# Altium PCB Driver3.PcbDoc
Units mm, origin at the board's own origin, x right, y up, seen from the top; angles counter-clockwise.
Board outline 113.95 x 149.85 mm, 2 copper layers (Top Layer, Bottom Layer); 34 components, 82 nets, 157 pads, 0 vias.
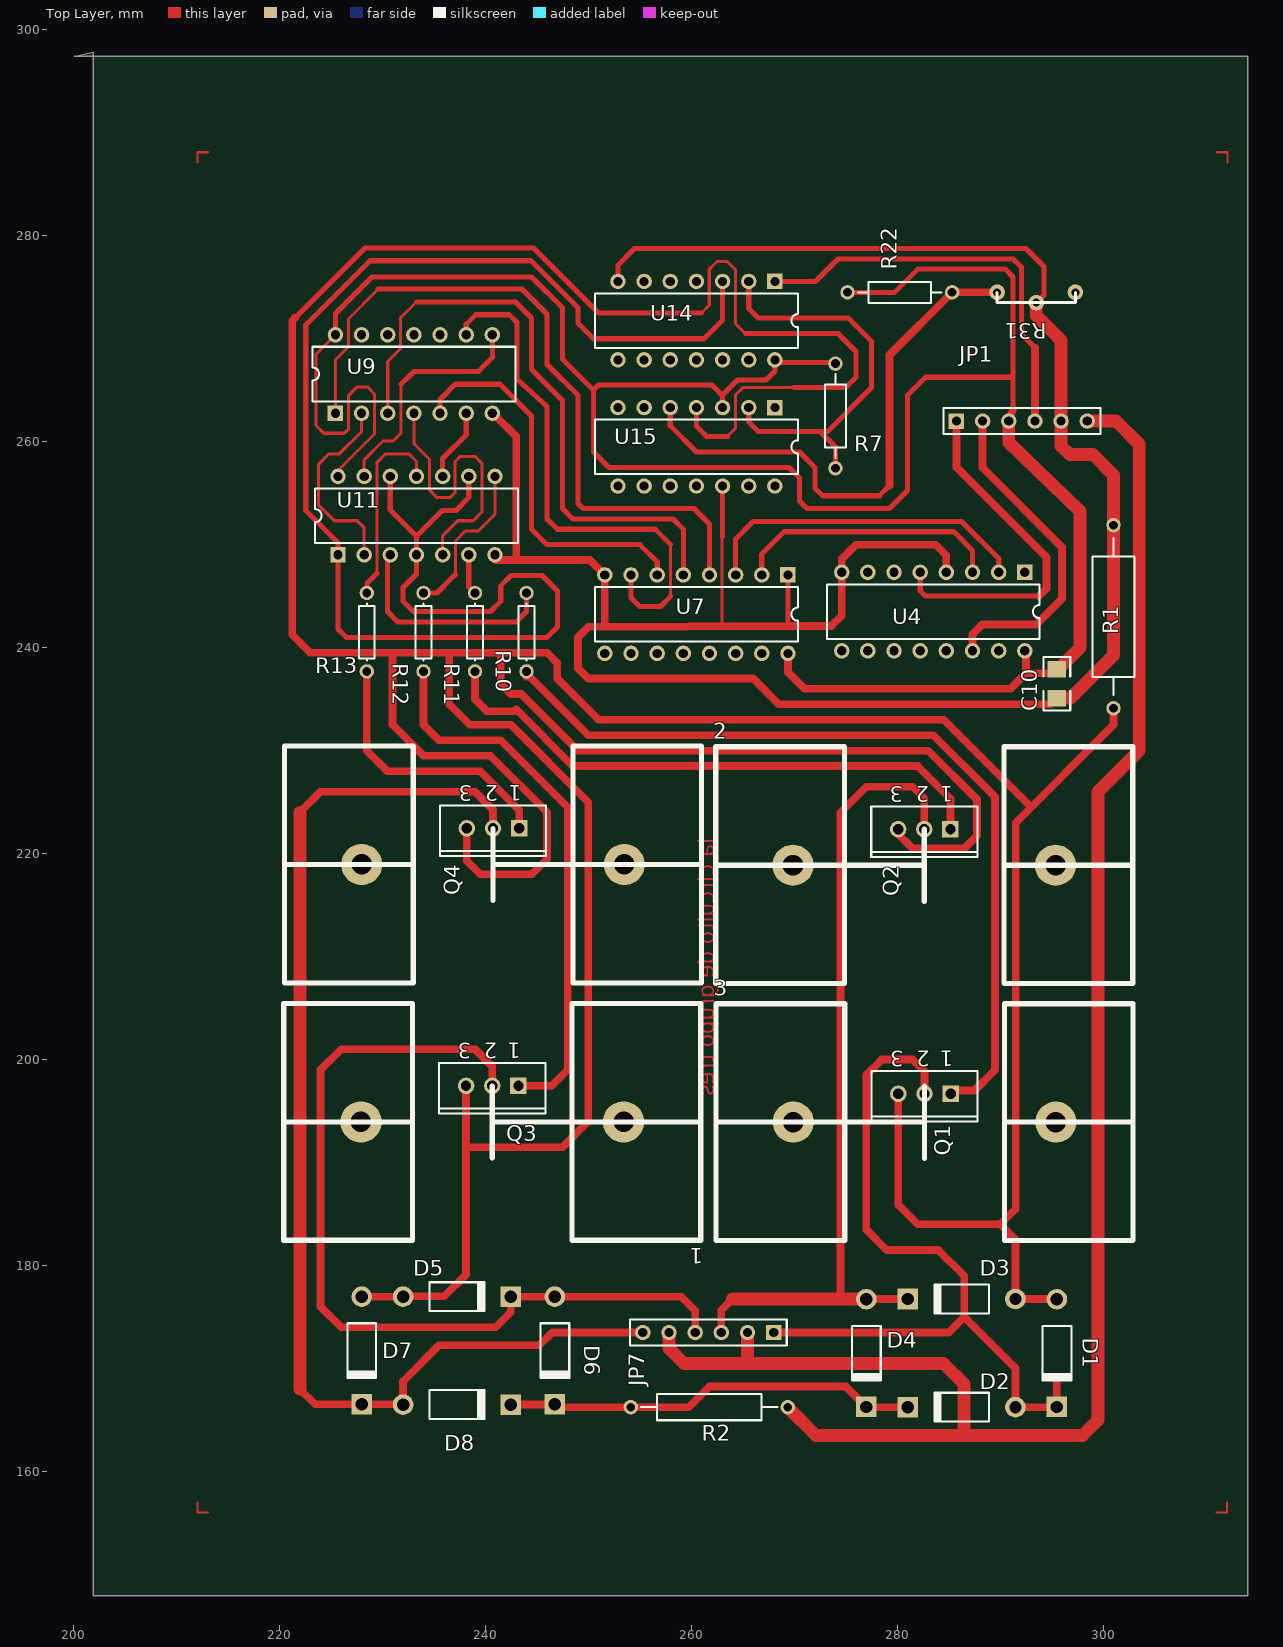
[diagram p0: Top Layer view]
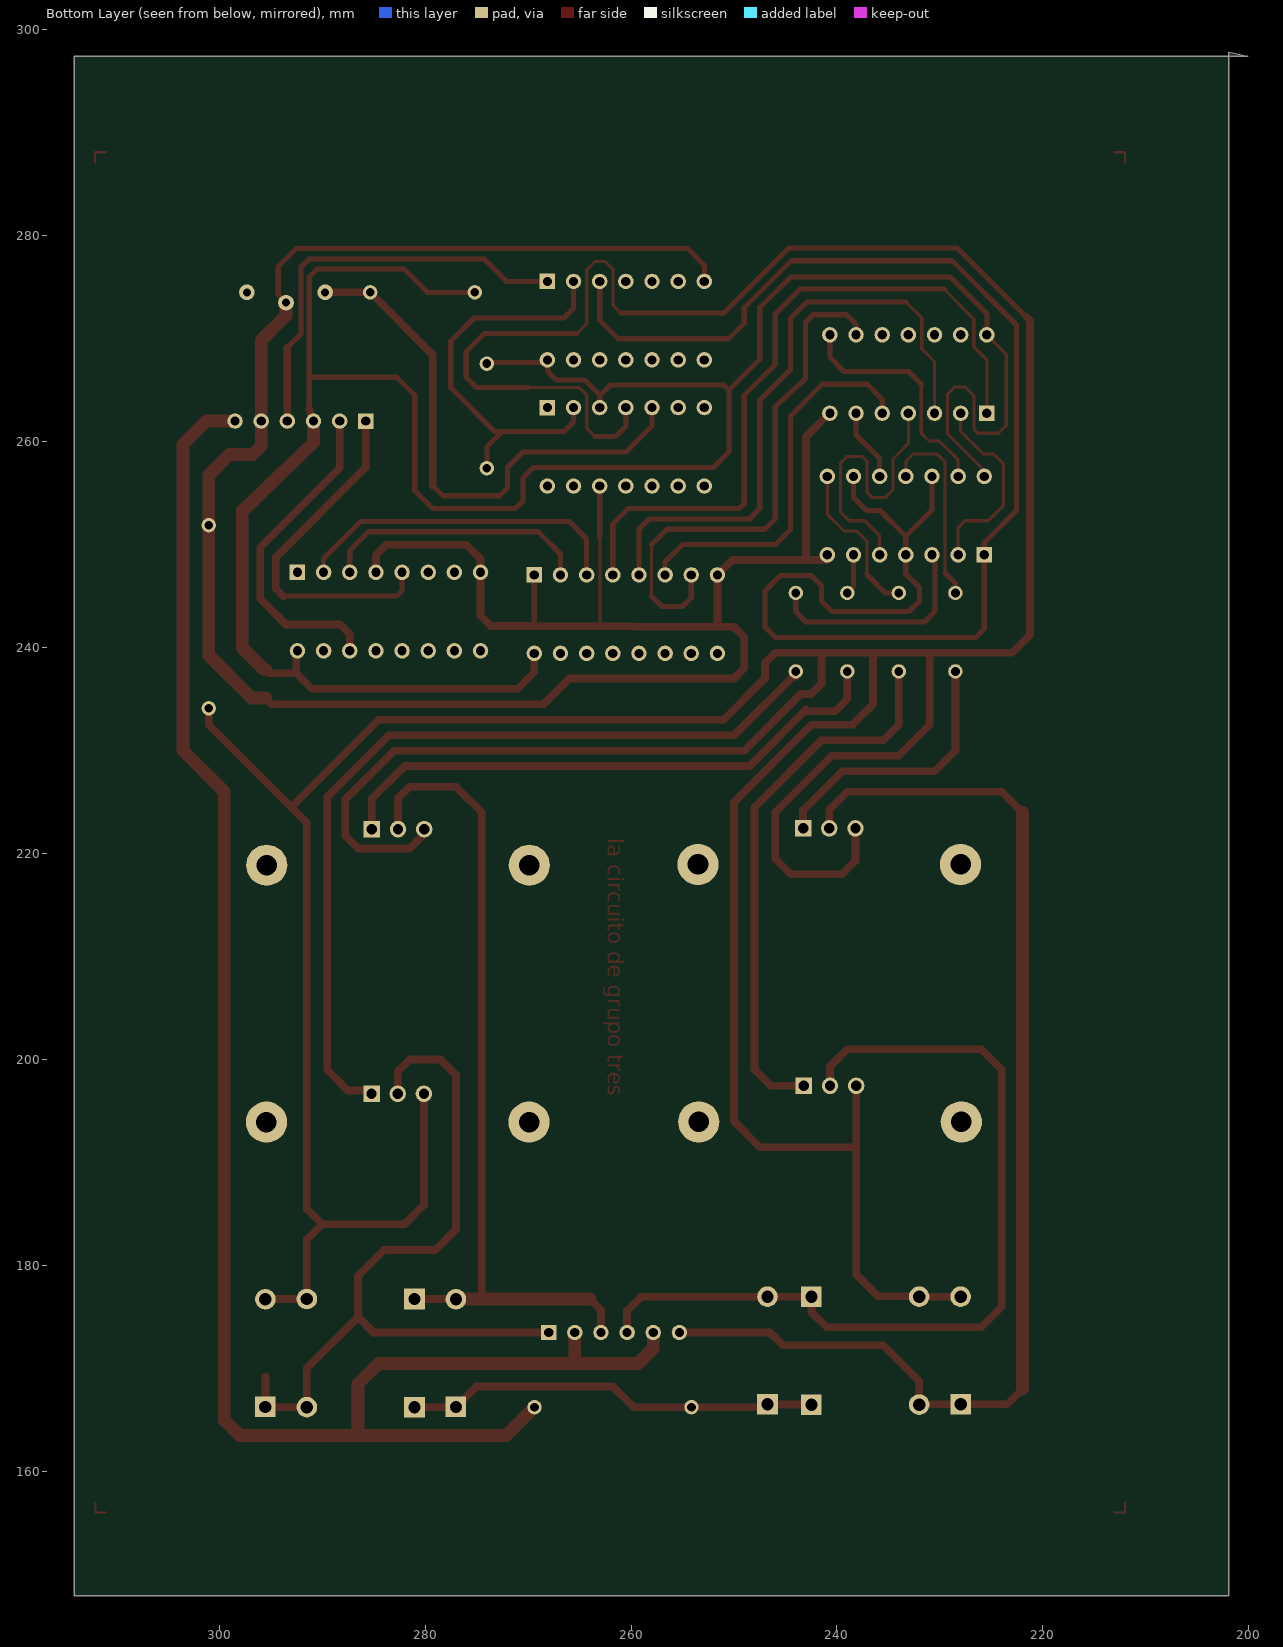
[diagram p1: Bottom Layer view, seen from below]

## Layer stack, top to bottom
Top Layer: signal copper 0.0356
Dielectric: dielectric 0.32, FR-4, Dk 4.8
Bottom Layer: signal copper 0.0356

## Board outline
200.1,297.4 314.05,297.4 314.05,147.95 201.95,147.95 201.95,297.8

## Design rules (kind name [scope] priority, off if disabled: settings)
Clearance [All] p1: gap=0.254
ComponentClearance [All] p1: gap=0.254 collisioncheckmode=0
PolygonConnect [All] p1: connectstyle=Relief reliefconductorwidth=0.254 reliefentries=4 polygonreliefangle="90 Angle"
RoomDefinition Driver [InComponentClass('Driver')] p1: confinementstyle=ConfineIn formatcopy=TRUE outline 225.262,383.686 276.062,383.686 276.062,409.086 225.262,409.086
RoutingLayers [All] p1: top layer=Any bottom layer="Not Used"
RoutingVias [All] p1: holewidth=0.711 width=1.27 viastyle="Through Hole" minholewidth=0.711 minwidth=1.27 maxholewidth=0.711 maxwidth=1.27
SolderMaskExpansion [All] p1: expansion=0.102
TestPointUsage [All] p1: valid=0 allowmultiple=FALSE
Testpoint [All] p1: side=15 testpointundercomponent=TRUE minsize=1.016 maxsize=2.54 preferedsize=1.524 minholesize=0 maxholesize=1.016 preferedholesize=0.813 testpointgrid=0.025 style=1023 order=1234567890
Width [All] p1: maxlimit=25 minlimit=0.254 preferedwidth=0.254 toplayer_prefwidth=0.5 bottomlayer_maxwidth=2.54 minimp=50.000000 maximp=50.000000 favimp=50.000000
16 further rules are at their usual default settings.

## Components (designator, comment, footprint, x,y, rotation, side; value= is the part's Value field where it differs from the comment)
1 "" "Heat Sink" 263.425,203.95 r180 top
2 "" "Heat Sink" 259.875,208.875 r0 top
3 "" "Heat Sink" 259.9,183.925 r0 top
C10 "XTAL" C3216-1206 295.5,236.5 r90 top
D1 "1N4004" DIO10.46-5.3x2.8 295.5,171.5 r270 top
D2 "1N4004" DIO10.46-5.3x2.8 286.25,166.25 r180 top
D3 "1N4004" DIO10.46-5.3x2.8 286.25,176.75 r180 top
D4 "1N4004" DIO10.46-5.3x2.8 277,171.5 r270 top
D5 "1N4004" DIO10.46-5.3x2.8 237.25,176.98 r0 top
D6 "1N4004" DIO10.46-5.3x2.8 246.75,171.75 r270 top
D7 "1N4004" DIO10.46-5.3x2.8 228,171.75 r270 top
D8 "1N4004" DIO10.46-5.3x2.8 237.25,166.5 r0 top
JP1 "Header 6" HDR1X6 285.75,262 r0 top
JP7 "Header 6" HDR1X6 268,173.5 r180 top
Q1 "MJE15030" SFM-T3/X1.6V 282.65,196.675 r180 top
Q2 "MJE15030" SFM-T3/X1.6V 282.625,222.375 r180 top
Q3 "MJE15030" SFM-T3/X1.6V 240.675,197.45 r180 top
Q4 "MJE15030" SFM-T3/X1.6V 240.75,222.45 r180 top
R1 "" AXIAL-0.7 301,243 r90 top
R2 "" AXIAL-0.6 261.75,166.25 r0 top
R7 "" AXIAL-0.4 274,262.5 r90 top
R10 "1K" AXIAL-0.3 244,241.5 r270 top
R11 "1K" AXIAL-0.3 239,241.5 r270 top
R12 "1K" AXIAL-0.3 234,241.5 r270 top (schematic designator R11)
R13 "Res1" AXIAL-0.3 228.5,241.5 r90 top
R22 "" AXIAL-0.4 280.25,274.5 r180 top
R31 "" "Var res" 293.5,273.5 r180 top
U4 "DM74LS191N" DIP-16 283.5,243.5 r180 top
U7 "SN74LS139AN" DIP-16/X1.5 260.5,243.25 r180 top
U9 "SN74LS04N" DIP-14/D19.7 233.068,266.568 r0 top
U11 "SN74LS08N" DIP-14/D19.7 233.318,252.818 r0 top
U14 "SN74LS08N" DIP-14/D19.7 260.5,271.75 r180 top
U15 "LM339N" DIP-14/D19.7 260.5,259.5 r180 top
? "" "Heat Sink" 263.5,228.95 r180 top

## Footprints (in the part's own frame and the unit in brackets; to place one, negate y for a bottom-side part, rotate by r counter-clockwise, add the part's x,y. Pads: shape width x height; smd on the part's side, far side on the other; paste and mask are expansions set on the pad)
AXIAL-0.3 [mm]
  round 1.4 hole 0.85: 1(-3.81,0) 2(3.81,0)
  silkscreen extent -2.77,-0.76 2.77,0.76
AXIAL-0.4 [mm]
  round 1.4 hole 0.85: 1(-5.08,0) 2(5.08,0)
  silkscreen extent -4.06,-1.02 4.06,1.02
AXIAL-0.6 [mm]
  round 1.4 hole 0.85: 1(-7.62,0) 2(7.62,0)
  silkscreen extent -6.6,-1.27 6.6,1.27
AXIAL-0.7 [mm]
  round 1.4 hole 0.85: 1(-8.89,0) 2(8.89,0)
  silkscreen extent -7.62,-2.03 7.62,2.03
C3216-1206 [mm]
  rect 1.6x1.8 smd: 1(-1.4,0) 2(1.4,0)
  silkscreen extent -2.6,-1.3 2.6,1.3
DIO10.46-5.3x2.8 [mm]
  round 2 hole 1.2: 1(-5.23,0)
  rect 2x2 hole 1.2: 2(5.23,0)
  silkscreen extent -2.65,-1.4 2.75,1.4
DIP-14/D19.7 [mm]
  rect 1.5x1.5 hole 0.9: 1(-7.62,-3.81)
  round 1.5 hole 0.9: 2(-5.08,-3.81) 3(-2.54,-3.81) 4(0,-3.81) 5(2.54,-3.81) 6(5.08,-3.81) 7(7.62,-3.81) 8(7.62,3.81) 9(5.08,3.81) 10(2.54,3.81) 11(0,3.81) 12(-2.54,3.81) 13(-5.08,3.81) 14(-7.62,3.81)
  silkscreen extent -9.85,-2.65 9.85,2.65
DIP-16 [mm]
  rect 1.5x1.5 hole 0.9: 1(-8.89,-3.81)
  round 1.5 hole 0.9: 2(-6.35,-3.81) 3(-3.81,-3.81) 4(-1.27,-3.81) 5(1.27,-3.81) 6(3.81,-3.81) 7(6.35,-3.81) 8(8.89,-3.81) 9(8.89,3.81) 10(6.35,3.81) 11(3.81,3.81) 12(1.27,3.81) 13(-1.27,3.81) 14(-3.81,3.81) 15(-6.35,3.81) 16(-8.89,3.81)
  silkscreen extent -10.3,-2.65 10.3,2.65
DIP-16/X1.5 [mm]
  rect 1.5x1.5 hole 0.9: 1(-8.89,-3.81)
  round 1.5 hole 0.9: 2(-6.35,-3.81) 3(-3.81,-3.81) 4(-1.27,-3.81) 5(1.27,-3.81) 6(3.81,-3.81) 7(6.35,-3.81) 8(8.89,-3.81) 9(8.89,3.81) 10(6.35,3.81) 11(3.81,3.81) 12(1.27,3.81) 13(-1.27,3.81) 14(-3.81,3.81) 15(-6.35,3.81) 16(-8.89,3.81)
  silkscreen extent -9.85,-2.65 9.85,2.65
HDR1X6 [mm]
  rect 1.5x1.5 hole 0.9: 1(0,0)
  round 1.5 hole 0.9: 2(2.54,0) 3(5.08,0) 4(7.62,0) 5(10.16,0) 6(12.7,0)
  silkscreen extent -1.27,-1.27 13.97,1.27
"Heat Sink" [mm]
  round 4 hole 2: 0(35.5,10) 2(10,10)
  silkscreen extent 2.5,-1.5 43,21.5
SFM-T3/X1.6V [mm]
  rect 1.6x1.6 hole 1: 1(-2.54,0)
  round 1.6 hole 1: 2(0,0) 3(2.54,0)
  silkscreen extent -5.15,-2.2 5.15,2.7
"Var res" [mil]
  round 60 hole 30: 0(0,0) 1(-149.61,-39.37) 2(149.61,-39.37)
  silkscreen extent -150,-39 150,0

## Part data
D1 D2 D3 D4 D5 D6 D7 D8: "1.0 Ampere General Purpose Rectifier"
JP1 JP7: "Header, 6-Pin"
Q1 Q2 Q3 Q4: "Complementary Silicon Plastic Power Transistor"
R10: library part Res1, "Resistor"
R11 R12: library part res1, "Resistor"
R13: "Resistor"
U4: "Synchronous 4-Bit Up/Down Counter with Mode Control"
U7: "Dual 2-Line to 4-Line Decoder / Demultiplexer"
U9: "Hex Inverter"
U11 U14: "Quadruple 2-Input Positive-AND Gate"
U15: "Quad Single-Supply Comparator"

## Nets (pads, with @x,y where several pads share a name; then routed paths per layer and width w, separated by ;. In a path a pad name is that pad's centre, name@x,y a point inside that pad or via, vN(x,y) a via of type N, cw(c..) or ccw(c..) an arc to the next point about the centre after c; other vN are vias at no path point)
+5V: 
+5V: 
+5V: 
+5V: 
+5V: 
+5V: 
+5V: 
+5V: 
+12V: 
+12V: 
+12V: 
+12V: 
+12V: 
+12V: 
+12V: 
+12V: 
+12V: JP1.6 JP7.2 JP7.5 R2.2 | length 173.9
  Top Layer w1.25: JP7.5 257.84,171.96 259.3,170.5 284.5,170.5 286.5,168.5 286.5,163.5 ; 265.46,170.51 JP7.2 ; R2.2 272.12,163.5 298,163.5 299.5,165 299.5,226 303.5,230 303.5,259.75 301.25,262 JP1.6
"CLOCK PIC1": 
"COIL OFF": JP1.4 U14.1 | length 40.7
  Top Layer w0.5: U14.1 272.06,275.56 274.25,277.75 291.25,277.75 292.05,276.95 292.05,270.45 293.37,269.13
  Top Layer w0.75: JP1.4 293.37,269.13
"DATA IN PIC1": 
"DATA OUT PIC1": 
GND: C10.1 JP1.5 R1.2 R31.0 U4.4 U4.8 U7.1 U7.8 U9.7 U11.7 U14.7 U15.12 | length 241.1
  Top Layer w0.3: U11.7 U11.7@240.938,249.188 ; 263,242.25 263,250.75
  Top Layer w0.5: U11.7@240.938,248.948 U11.7 ; U14.7 252.88,277.13 254.5,278.75 292.5,278.75 294.25,277 294.25,274.25 R31.0 ; U15.12@262.54,255.69 262.81,255.69 U15.12@263,255.5 ; 263.04,250.79 U15.12 ; 269.39,242.11 U7.1
  Top Layer w0.75: U9.7 240.742,262.758 243,260.5 243,248.5 ; U11.7 240.938,248.562 241,248.5 250.17,248.5 U7.8 251.61,242.11 ; U4.4 284.77,248.98 283.75,250 276,250 274.61,248.61 274.61,243.11 273.61,242.11 269.39,242.11 250,242 249,241 249,238 250,237 266,237 268.5,234.5 294.9,234.5 C10.1
  Top Layer w1.25: R31.0 293.5,272.25 295.91,269.84 JP1.5 295.91,259.59 296.75,258.75 299,258.75 301,256.75 301,239.25 296.85,235.1 C10.1
"HOME PIC1": 
NetB1A_1: D3.2 D4.1 JP7.3 Q2.2 | length 80.6
  Top Layer w0.75: JP7.3 262.92,175.67 263,175.75 264,176.75 ; 274.5,176.75 274.5,224 277,226.5 281.5,226.5 282.625,225.375 Q2.2 ; D4.1 277,176.75 D3.2
  Top Layer w1.25: 264,176.75 276.98,176.75 D4.1
NetB1A_2: D1.2 D2.1 JP7.1 Q1.2 | length 76.2
  Top Layer w0.75: JP7.1 285,173.5 286.5,175 ; Q1.2 282.65,198.85 281.5,200 278.5,200 277,198.5 277,183.5 279,181.5 284,181.5 286.5,179 286.5,175 ; 295.5,169.2 D1.2 295.48,166.25 D2.1 291.48,170.02 286.5,175
NetB1B_1: D7.2 D8.1 JP7.6 Q4.2 | length 116.3
  Top Layer w0.75: 222,168 223.48,166.52 232,166.52 D8.1 232.02,168.77 235.5,172.25 245.25,172.25 246.5,173.5 JP7.6 ; 222,224 224,226 239,226 240.75,224.25 Q4.2
  Top Layer w1.25: 222,168 222,224
NetB1B_2: D5.2 D6.1 JP7.4 Q3.2 | length 85.1
  Top Layer w0.75: Q3.2 240.675,199.325 239,201 226,201 224,199 224,176 226,174 241,174 242.48,175.48 D5.2 259.02,176.98 260.38,175.62 JP7.4
NetC4_2: 
NetC5_2: 
NetD1_1: D1.1 D3.1 D5.1 D7.1 Q1.3 Q2.3 Q3.3 Q4.3 R1.1 U15.4 | length 498.3
  Top Layer w0.3: 261,272.5 261.75,273.25 261.75,276.75 262.5,277.5 263.5,277.5 264.3,276.7 264.3,271.45 265.25,270.5 ; 263.5,260.5 264.3,261.3 264.3,264.55 265,265.25 270,265.25
  Top Layer w0.5: 221.568,272.068 228.318,278.818 244.682,278.818 251,272.5 261,272.5 ; U15.4 260.5,261.5 261.5,260.5 263.5,260.5 ; 265.25,270.5 274.25,270.5 276,268.75 276,266.25 275,265.25 270,265.25
  Top Layer w0.75: 221.568,272.068 221.25,271.75 221.25,241.25 223,239.5 246,239.5 247,238.5 247,237 251,233 284.5,233 293,224.5 ; D7.1 D5.1 232.02,177.02 236.02,177.02 238.135,179.135 Q3.3 ; 231,239.5 231,232.5 234,229.5 240.5,229.5 246,224 246,219.5 244.5,218 239.5,218 238.21,219.29 Q4.3 ; 236.5,239.5 236.5,234.5 238.5,232.5 242.5,232.5 250,225 250,194 247.5,191.5 238.135,191.5 ; 241.5,239.5 241.5,236.5 242.5,235.5 243.5,235.5 249,230 283,230 287.75,225.25 287.75,221.75 286.5,220.5 281.5,220.5 279.96,222.04 Q2.3@279.96,222.5 ; Q1.3 280.11,185.89 282,184 290,184 ; D1.1@295.48,176.75 D3.1 291.48,182.52 290,184 ; D1.1 D1.1@295.5,176.75 ; R1.1 301,232.5 291.5,223 291.5,185.5 290,184
NetD2_2: D2.2 D4.2 D6.2 D8.2 R2.1 | length 41
  Top Layer w0.75: D8.2 D6.2@246.73,166.5 ; R2.1@253.88,166.5 R2.1 ; D2.2 277.02,166.25 275.02,168.25 261.75,168.25 259.75,166.25 D6.2@246.98,166.25 ; D6.2@246.73,166.5 D6.2@246.98,166.25 ; D6.2@246.73,166.5 D6.2@246.98,166.25
NetJP4_1: 
NetJP4_2: 
NetJP4_3: 
NetJP4_4: 
NetJP4_5: 
NetQ1_1: Q1.1 R10.2 | length 81.7
  Top Layer w0.75: R10.2@244,237.19 244.31,237.19 250,231.5 283.5,231.5 289.5,225.5 289.5,199 287.5,197 Q1.1@285.5,197
NetQ1_2: 
NetQ2_1: Q2.1 R11.2 | length 56.1
  Top Layer w0.75: R11.2 239,235 240.169,233.831 243.169,233.831 ; 243,234 248.5,228.5 282,228.5 285.165,225.335 Q2.1
NetQ2_2: 
NetQ3_1: Q3.1 R12.2 | length 53.4
  Top Layer w0.75: R12.2 234,232.5 235.5,231 241.5,231 248,224.5 248,199 246.45,197.45 Q3.1
NetQ3_2: 
NetQ4_1: Q4.1 R13.1 | length 26.6
  Top Layer w0.75: R13.1 228.5,230 230.5,228 239.5,228 243.29,224.21 Q4.1
NetQ4_2: 
NetQ6_2: 
NetQ7_2: 
NetQ8_2: 
NetQ10_2: 
NetQ11_2: 
NetQ12_2: 
NetR7_1: R7.1 U14.2 U15.2 | length 40
  Top Layer w0.5: U15.2 265.58,261.92 266.5,261 273.25,261 277.5,265.25 277.5,269.75 275.25,272 266.5,272 265.58,272.92 U14.2 ; 272.5,261 274,259.5 R7.1
NetR10_1: R10.1 U11.3 | length 22.2
  Top Layer w0.5: U11.3@230.5,249 230.508,249.008 U11.3 ; U11.3@230.778,248.858 U11.3 ; R10.1 244,243.5 243,242.5 231.5,242.5 230.5,243.5 230.5,248.73 U11.3
NetR11_1: R11.1 U11.6 | length 3.9
  Top Layer w0.5: U11.6 238.398,245.912 R11.1
NetR12_1: R12.1 U11.8 | length 15.7
  Top Layer w0.3: 237.1,247.1 237.1,250.35 238.068,251.318 239.318,251.318 240.938,252.938 U11.8
  Top Layer w0.5: R12.1 235.31,245.31 236.75,246.75 237.1,247.1
NetR13_2: R13.2 U11.11 | length 19
  Top Layer w0.3: 229.5,247.25 229.5,258 230.318,258.818 232.568,258.818 233.318,258.068 U11.11
  Top Layer w0.5: R13.2@228.476,245.31 R13.2 228.5,246.25 229.5,247.25
NetR22_1: R22.1 R31.2 U15.5 | length 53.1
  Top Layer w0.5: U15.5 257.96,261.54 260.5,259 270.5,259 272,257.5 272,255.5 272.75,254.75 278.25,254.75 279.25,255.75
  Top Layer w0.75: 279.25,255.75 279.25,268.42 R22.1 R31.2
NetR22_1: 
NetR25_1: 
NetR26_1: 
NetR27_1: 
NetR28_1: 
NetU1_10: JP1.2 U4.14 | length 32.2
  Top Layer w0.75: U4.14 287.31,241.31 288.25,242.25 293.5,242.25 296,244.75 296,249.75 288.29,257.46 JP1.2
NetU1_11: JP1.1 U4.5 | length 34.5
  Top Layer w0.3: U4.5@281.73,247.52 U4.5@281.73,247.56
  Top Layer w0.5: U4.5 282.23,245.52 282.75,245 293.75,245
  Top Layer w0.75: JP1.1 285.75,257.5 294.5,248.75 294.5,245.75 293.75,245
NetU4_2: U4.2 U7.3 | length 32.6
  Top Layer w0.5: U7.3 264.31,250.56 266,252.25 286.25,252.25 289.85,248.65 U4.2
NetU4_3: U4.3 U7.2 | length 26.3
  Top Layer w0.5: U7.2 266.85,249.1 269,251.25 285.5,251.25 287.31,249.44 U4.3
NetU7_4: U7.4 U9.1 | length 69.4
  Top Layer w0.3: U9.1 225.448,267.948 226.718,269.218 226.718,271.918 229.568,274.768 229.568,274.818
  Top Layer w0.5: 229.568,274.818 243.568,274.818 246,272.386 246,267.5 249,264.5 249,254 249.5,253.5 260.27,253.5 261.77,252 U7.4
NetU7_5: U7.5 U9.3 | length 60.5
  Top Layer w0.3: U9.3 230.528,267.778 231.768,269.018 231.768,272.018 233.318,273.568
  Top Layer w0.5: 233.318,273.568 242.932,273.568 244.5,272 244.5,267 247.5,264 247.5,253.5 248.5,252.5 258.23,252.5 259.23,251.5 U7.5
NetU7_6: U7.6 U9.5 | length 37.9
  Top Layer w0.5: U9.5 235.608,264.108 237.068,265.568 241.432,265.568 244.5,262.5 244.5,251.5 246,250 255,250 256.69,248.31 U7.6
NetU7_7: U7.7 U9.9 | length 51.6
  Top Layer w0.3: 258,245 258,250
  Top Layer w0.5: U9.9 238.148,271.398 239.068,272.318 242.318,272.318 243.068,271.568 ; 243.068,271.318 243.068,266.068 245.568,263.818 246,263.386 246,252.5 247,251.5 256.5,251.5 258,250 ; U7.7 254.15,244.85 255,244 257,244 258,245
NetU9_2: U9.2 U11.2 | length 19.2
  Top Layer w0.3: U9.2 227.988,260.988 225.818,258.818 224.818,258.818 223.818,257.818 223.818,253.818 225.318,252.318 227.568,252.318 228.238,251.648 U11.2
NetU9_4: U9.4 U11.5 | length 28.6
  Top Layer w0.3: U9.4 233.068,259.818 234.568,258.318 234.568,255.318 235.318,254.568 236.568,254.568 237.068,255.068 237.068,258.068 237.568,258.568 239.068,258.568 239.068,258.518 239.668,257.918 239.668,253.168 238.818,252.318 237.318,252.318 235.858,250.858 U11.5
NetU9_6: U9.6 U11.10 | length 7.4
  Top Layer w0.3: U11.10@235.508,256.628 U11.10
  Top Layer w0.5: U11.10 235.858,258.358 238.148,260.648 U9.6
NetU9_8: U9.8 U11.13 | length 23.2
  Top Layer w0.3: U11.13 228.238,258.238 230.068,260.068 231.068,260.068 231.818,260.818 231.818,265.568
  Top Layer w0.5: 231.818,265.568 233.068,266.818 239.318,266.818 240.688,268.188 U9.8
NetU11_1: U11.1 U11.4 U11.9 U11.12 U14.3 | length 148.7
  Top Layer w0.5: U11.12 230.778,253.358 233.318,250.818 ; U11.9 238.398,254.568 237.148,253.318 235.818,253.318 233.318,250.818 ; U14.3 263.04,271.79 261.25,270 250.5,270 249,271.5 249,273 244.432,277.568 228.818,277.568 222.568,271.318 222.568,253.318 225.698,250.188 225.698,241.802 226.5,241 246,241 247,242 247,245.5 245.5,247 242.5,247 241.5,246 241.5,244.5 240.5,243.5 233,243.5 232,244.5 232,245.826 233.318,247.144 U11.4 233.318,250.818
"RESET PIC1": 
"STATUS PIC1": 
VCC: 
VDD: C10.2 JP1.3 R7.2 R22.2 U4.16 U7.16 U9.14 U11.14 U14.14 U15.3 | length 244.5
  Top Layer w0.3: U9.14@225.128,270.378 U9.14@225.128,270.508 ; U9.14 223.568,268.498 223.568,261.568 224.318,260.818 226.318,260.818 226.7,261.2 226.7,264.45 227.568,265.318 228.568,265.318 229.25,264.636 229.25,260.75 225.698,257.198 U11.14
  Top Layer w0.5: U9.14 225.448,272.448 229,276 244.5,276 247.5,273 247.5,268 250.5,265 ; U15.3 263.04,264.54 264.5,266 267.25,266 268.12,266.87 U14.14 ; 263.04,264.46 262,265.5 251,265.5 250.5,265 ; U14.14@268.12,267.69 R7.2@273.89,267.69 ; R22.2 279.75,274.5 282,276.75 290.5,276.75 291.25,276 291.25,263.182 ; 291.25,266.25 282.75,266.25 281,264.5 281,255.25 279.25,253.5 271.25,253.5 270.5,254.25 270.5,256.5 269.5,257.5 252,257.5 250.5,259 250.5,265
  Top Layer w0.75: U7.16 269.39,237.61 271,236 291,236 292.5,237.5 ; JP1.3 291.25,263.182 ; U4.16@292.5,239.5 292.5,237.5 ; C10.2 295.1,237.5 292.5,237.5
  Top Layer w1.25: JP1.3 290.83,259.92 297.75,253.25 297.75,240 295.65,237.9 C10.2
VDD: 
VDD: 
VDD: 
VDD: 
pads on no net: 1.0 1.2 2.0 2.2 3.0 3.2 ?.0 ?.2 R31.1 U4.1 U4.6 U4.7 U4.9 U4.10 U4.11 U4.12 U4.13 U4.15 U7.9 U7.10 U7.11 U7.12 U7.13 U7.14 U7.15 U9.10 U9.11 U9.12 U9.13 U14.4 U14.5 U14.6 U14.8 U14.9 U14.10 U14.11 U14.12 U14.13 U15.1 U15.6 U15.7 U15.8 U15.9 U15.10 U15.11 U15.13 U15.14
copper on no net: | length 8
  Top Layer w0.2: 212.05,157 212.05,156 213.05,156 ; 212.05,287.1 212.05,288.1 213.05,288.1 ; 311,156 312,156 312,157 ; 311.05,288.1 312.05,288.1 312.05,287.1

## Other copper
Top Layer:
  text "la circuito de grupo tres" at 262.25,221.5 h1.52 r90

## Text inside footprints (layer, text, board x,y; h text height)
Q1: Top Overlay "1" at 285.44,200.85 h1.5 r180; Top Overlay "2" at 283.15,200.85 h1.5 r180; Top Overlay "3" at 280.61,200.85 h1.5 r180
Q2: Top Overlay "3" at 280.585,226.55 h1.5 r180; Top Overlay "2" at 283.125,226.55 h1.5 r180; Top Overlay "1" at 285.415,226.55 h1.5 r180
Q3: Top Overlay "3" at 238.635,201.625 h1.5 r180; Top Overlay "2" at 241.175,201.625 h1.5 r180; Top Overlay "1" at 243.465,201.625 h1.5 r180
Q4: Top Overlay "3" at 238.71,226.625 h1.5 r180; Top Overlay "2" at 241.25,226.625 h1.5 r180; Top Overlay "1" at 243.54,226.625 h1.5 r180